# Altium PCB PCB1.PcbDoc
Units mil, origin at the board's own origin, x right, y up, seen from the top; angles counter-clockwise.
Board outline 1115 x 680 mil, 2 copper layers (Top Layer, Bottom Layer); 11 components, 15 nets, 59 pads, 13 vias.
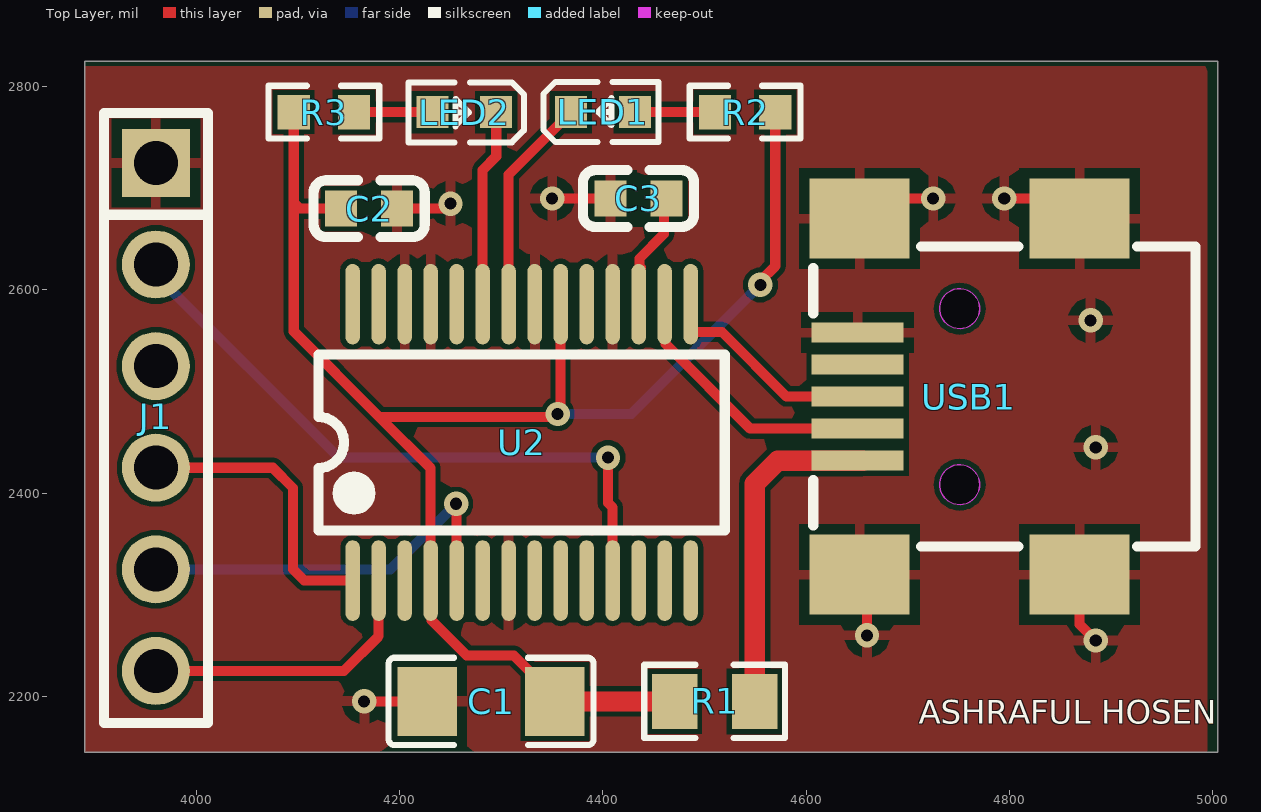
[diagram p0: Top Layer view]
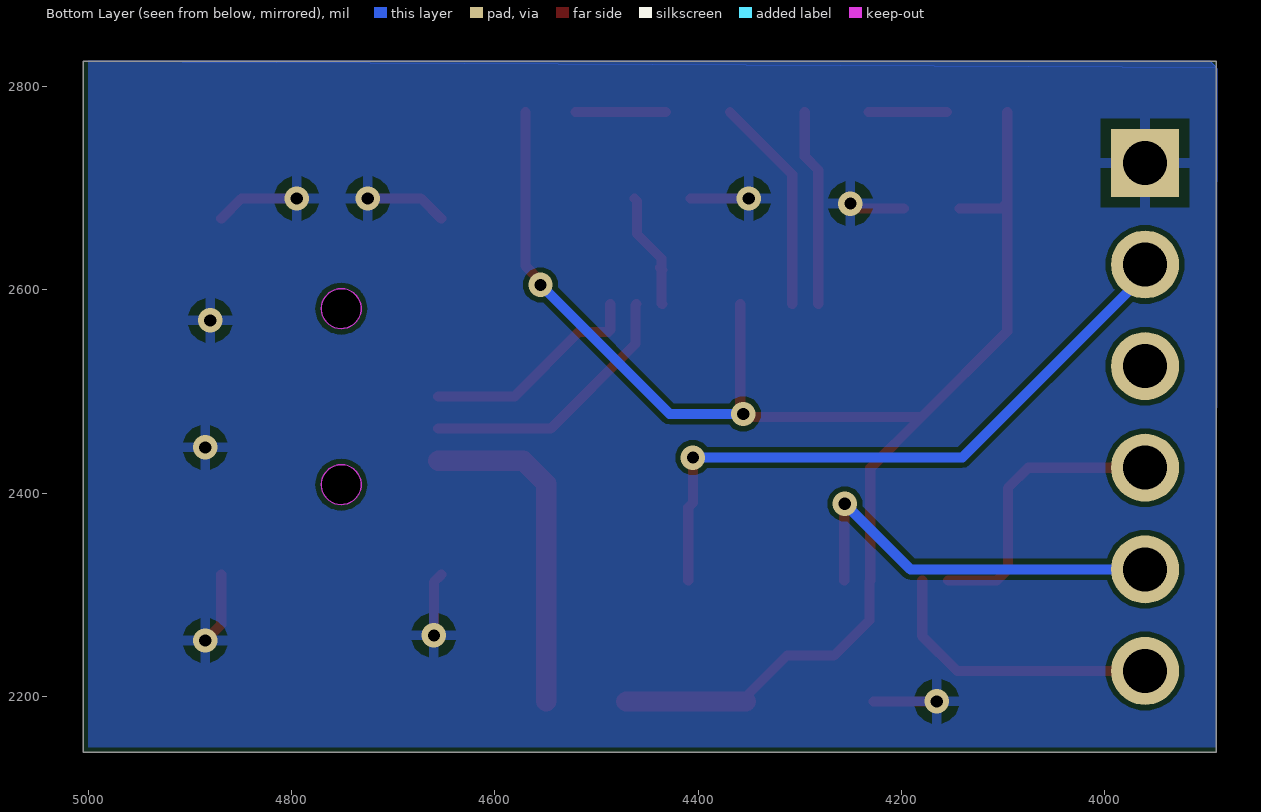
[diagram p1: Bottom Layer view, seen from below]

## Layer stack, top to bottom
Top Solder: solder mask 0.4, Solder Resist, Dk 3.5
Top Layer: signal copper 1.4
Dielectric 1: dielectric 12.6, FR-4, Dk 4.8
Bottom Layer: signal copper 1.4
Bottom Solder: solder mask 0.4, Solder Resist, Dk 3.5

## Board outline
3890,2145 5005,2145 5005,2825 3890,2825

## Design rules (kind name [scope] priority, off if disabled: settings)
Clearance [All] p1: gap=5 ignorepadtopadclearanceinfootprint=TRUE
PolygonConnect [All] p1: connectstyle=Relief reliefconductorwidth=10 reliefentries=4 polygonreliefangle="90 Angle" airgapwidth=10
RoutingVias [All] p1: holewidth=28 width=50 viastyle="Through Hole" minholewidth=28 minwidth=50 maxholewidth=28 maxwidth=50
SolderMaskExpansion [All] p1: expansion=4 istentingtop=FALSE
SupplyNets "Schematic Supply Nets_3" [InNet('+5V')] p1: voltage=0.000
SupplyNets "Schematic Supply Nets_2" [InNet('GND')] p2: voltage=0.000
SupplyNets "Schematic Supply Nets_1" [InNet('VCC')] p3: voltage=0.000
SupplyNets "Schematic Supply Nets" [InNet('+3V3')] p4: voltage=0.000
Width [All] p1: maxlimit=20 minlimit=10 preferedwidth=10
30 further rules are at their usual default settings.

## Components (designator, comment, footprint, x,y, rotation, side; value= is the part's Value field where it differs from the comment)
C1 "10uF" C1206 4290,2195 r0 top
C2 "0.1uF" C0603 4170,2680 r180 top value=100nF
C3 "0.1uF" C0603 4435,2690 r0 top value=100nF
J1 "HB-PH3-25416PB2GOP" HDR-TH_6P-P2.54-V-M 3960,2475 r270 top
LED1 "19-217/R6C-AL1M2VY/3T" LED0603-RD 4400,2775 r0 top
LED2 "19-217/R6C-AL1M2VY/3T" LED0603-RD 4263.52,2774.99 r180 top
R1 "0Ω" R0805 4510,2195 r0 top
R2 "1kΩ" R0603 4540,2775 r0 top
R3 "1kΩ" R0603 4125.34,2775 r180 top
U2 "FT232RL-REEL" SSOP-28_L10.2-W5.3-P0.65-LS7.8-BL 4320,2450 r0 top
USB1 "KH-MINI-SMT-5P-Cu" MINI-USB-SMD_KH-MINI-SMT-5P-CU 4760,2495 r90 top

## Footprints (in the part's own frame and the unit in brackets; to place one, negate y for a bottom-side part, rotate by r counter-clockwise, add the part's x,y. Pads: shape width x height; smd on the part's side, far side on the other; paste and mask are expansions set on the pad)
C0603 [mm]
  rect 0.8x0.9 smd: 1(-0.7,0) 2(0.7,0)
  silkscreen extent -1.39,-0.71 1.39,0.71
C1206 [mm]
  rect 1.485x1.728 smd paste-100 mask+0.051: 1(-1.593,0) 2(1.593,0)
  silkscreen extent -2.56,-1.09 2.56,1.09
HDR-TH_6P-P2.54-V-M [mm]
  rect 1.7x1.7 hole 1.1: 1(-6.35,0)
  round 1.7 hole 1.1: 2(-3.81,0) 3(-1.27,0) 4(1.27,0) 5(3.81,0) 6(6.35,0)
  silkscreen extent -7.6,-1.3 7.65,1.3
LED0603-RD [mm]
  rect 0.8x0.8 smd: 1(-0.799,0) 2(0.799,0)
  silkscreen extent -1.49,-0.75 1.39,0.76
MINI-USB-SMD_KH-MINI-SMT-5P-CU [mm]
  rect 0.5x2.3 smd paste+0 mask+0.05: 1(-1.6,2.775) 2(-0.8,2.775) 3(0,2.775) 4(0.8,2.775) 5(1.6,2.775)
  rect 2x2.5 smd paste+0 mask+0.05: 6(-4.45,-2.775) 7(-4.45,2.725) 8(4.45,-2.775) 9(4.45,2.725)
  Keep-Out Layer board cut-out: -1.7,0.225 -1.749,0.008 -1.888,-0.166 -2.089,-0.263 -2.311,-0.263 -2.512,-0.166 -2.65,0.008 -2.7,0.225 -2.7,0.225 -2.65,0.442 -2.512,0.616 -2.311,0.712 -2.089,0.712 -1.888,0.616 -1.749,0.442 -1.7,0.225
  Keep-Out Layer board cut-out: 2.7,0.225 2.65,0.008 2.512,-0.166 2.311,-0.263 2.089,-0.263 1.888,-0.166 1.749,0.008 1.7,0.225 1.7,0.225 1.749,0.442 1.888,0.616 2.089,0.712 2.311,0.712 2.512,0.616 2.65,0.442 2.7,0.225
  Keep-Out Layer circle w0.025: c-2.2,0.225 r0.5
  Keep-Out Layer circle w0.025: c2.2,0.225 r0.5
  Keep-Out Layer region: -1.7,0.225 -1.749,0.008 -1.888,-0.166 -2.089,-0.263 -2.311,-0.263 -2.512,-0.166 -2.65,0.008 -2.7,0.225 -2.7,0.225 -2.65,0.442 -2.512,0.616 -2.311,0.712 -2.089,0.712 -1.888,0.616 -1.749,0.442 -1.7,0.225
  Keep-Out Layer region: 2.7,0.225 2.65,0.008 2.512,-0.166 2.311,-0.263 2.089,-0.263 1.888,-0.166 1.749,0.008 1.7,0.225 1.7,0.225 1.749,0.442 1.888,0.616 2.089,0.712 2.311,0.712 2.512,0.616 2.65,0.442 2.7,0.225
  silkscreen extent -3.75,-5.67 3.75,3.89
R0603 [mil]
  rect 31.75x34.02 smd paste-3937.01 mask+2: 1(-29.66,0) 2(29.66,0)
  silkscreen extent -55,-26 55,26
R0805 [mm]
  rect 1.133x1.377 smd paste-100 mask+0.051: 1(-1,0) 2(1,0)
  silkscreen extent -1.76,-0.92 1.76,0.92
SSOP-28_L10.2-W5.3-P0.65-LS7.8-BL [mil]
  oval 14.33x79.35 smd: 1(-166.34,-136.03) 2(-140.75,-136.03) 3(-115.16,-136.03) 4(-89.57,-136.03) 5(-63.98,-136.03) 6(-38.39,-136.03) 7(-12.79,-136.03) 8(12.8,-136.03) 9(38.39,-136.03) 10(63.98,-136.03) 11(89.57,-136.03) 12(115.16,-136.03) 13(140.75,-136.03) 14(166.34,-136.03) 15(166.34,136.03) 16(140.75,136.03) 17(115.16,136.03) 18(89.57,136.03) 19(63.98,136.03) 20(38.39,136.03) 21(12.8,136.03) 22(-12.79,136.03) 23(-38.39,136.03) 24(-63.98,136.03) 25(-89.57,136.03) 26(-115.16,136.03) 27(-140.75,136.03) 28(-166.34,136.03)
  silkscreen extent -200,-87 200,87, body extent -201,-153 201,156, height 84

## Part data
C1: library part CL31A106KBHNNNE, "50V 10uF X5R ±10% 1206 Multilayer Ceramic Capacitors MLCC - SMD/SMT ROHS", JLCPCB Part Class="Basic Part", LCSC Part Name="10uF ±10% 50V", Manufacturer=SAMSUNG(三星), Tolerance=±10%, Add into BOM=yes, Convert to PCB=yes, Datasheet=https://atta.szlcsc.com/upload/public/pdf/source/20160218/1457707763339.pdf, Device=CL31A106KBHNNNE, Manufacturer Part=CL31A106KBHNNNE, Supplier=LCSC, Supplier Footprint=1206, Supplier Part=C13585, Symbol=CL31A106KBHNNNE
C2 C3: library part CC0603KRX7R9BB104, "50V 100nF X7R ±10% 0603 Multilayer Ceramic Capacitors MLCC - SMD/SMT ROHS", JLCPCB Part Class="Basic Part", LCSC Part Name="100nF ±10% 50V", Manufacturer=YAGEO(国巨), Temperature Coefficient=X7R, Tolerance=±10%, Voltage Rating=50V, Add into BOM=yes, Convert to PCB=yes, Datasheet=https://atta.szlcsc.com/upload/public/pdf/source/20180910/C282072_33301C7F631E79921B82A8DAC6BCC5B3.pdf, Device=CC0603KRX7R9BB104, Manufacturer Part=CC0603KRX7R9BB104, Supplier=LCSC, Supplier Footprint=0603, Supplier Part=C14663, Symbol=CC0603KRX7R9BB104
J1: "Gold 250V 3A Through Hole Pin Header 2.54mm 6P 6mm -40℃~+105℃ 3mm 2.54mm Brass Black 1 1x6P 2.54mm Plugin,P=2.54mm Pin Headers ROHS", Color=Black, Current Rating=3A, JLCPCB Part Class="Extended Part", LCSC Part Name="1x6P 间距:2.54mm 方针 直插", Manufacturer=HANBO(汉博), Operating Temperature=-40℃~+105℃, Voltage Rating (Max)=250V, Add into BOM=yes, Circluar Pins/Square Pins=Policy, Contact Material=Brass, Contact Plating=Gold, Convert to PCB=yes, Datasheet=https://atta.szlcsc.com/upload/public/pdf/source/20230803/F72D259687963761DF1B552F3BB84A31.pdf, Device=HB-PH3-25416PB2GOP, Insulation Height=2.54mm, Length of End Connection Pin=3mm, Length of Mating Pin=6mm, Manufacturer Part=HB-PH3-25416PB2GOP, Mounting Type=Straight, Number of Pins=6P, Number of Rows="Single Row", Pin Structure=1x6P, Pitch=2.54mm, Row Spacing=2.54mm, Supplier=LCSC, Supplier Footprint=插件,P=2.54mm, Supplier Part=C6332199, Symbol=HB-PH3-25416PB2GOP
LED1 LED2: "5mA Water Clear -40℃~+85℃ 617.5nm Red 120° 60mW 1.95V 0603 LED Indication - Discrete ROHS", Color Temperature=-, Emitted Color=Red, Forward Current=5mA, Forward Voltage (VF)=1.95V, JLCPCB Part Class="Extended Part", LCSC Part Name="红灯 停产 停产", Lens Color="Colorless Transparent Lens", Manufacturer=EVERLIGHT(亿光), Operating Temperature=-40℃~+85℃, Power Dissipation=60mW, Add into BOM=yes, Convert to PCB=yes, Datasheet=https://atta.szlcsc.com/upload/public/pdf/source/20160507/1462613613821.pdf, Device=19-217/R6C-AL1M2VY/3T, Diode Configuration=-, Dominant Wavelength=617.5nm, Manufacturer Part=19-217/R6C-AL1M2VY/3T, Mounting Sytle=-, Peak Wavelength=632nm, Supplier=LCSC, Supplier Footprint=0603, Supplier Part=C72044, Symbol=19-217/R6C-AL1M2VY/3T, Viewing Angle=120°
R1: library part "FRC0805P000 TS", "125mW Thick Film Resistor 150V ±5% 0Ω 0805 Chip Resistor - Surface Mount ROHS", JLCPCB Part Class="Extended Part", LCSC Part Name="0Ω ±5% 125mW 厚膜电阻", Manufacturer=FOJAN(富捷), Operating Temperature Range=-55℃~+155℃, Tolerance=±5%, Add into BOM=yes, Convert to PCB=yes, Datasheet=https://atta.szlcsc.com/upload/public/pdf/source/20211221/925EC7D7225764EE0046F22065062C87.pdf, Device="FRC0805P000 TS", Manufacturer Part="FRC0805P000 TS", Supplier=LCSC, Supplier Footprint=0805, Supplier Part=C2907288, Symbol="FRC0805P000 TS", Type="Thick Film Resistors"
R2 R3: library part RC0603FR-071KL, "100mW Thick Film Resistor 75V ±100ppm/℃ ±1% 1kΩ 0603 Chip Resistor - Surface Mount ROHS", JLCPCB Part Class="Extended Part", LCSC Part Name="厚膜电阻 1kΩ ±1% 100mW", Manufacturer=YAGEO(国巨), Operating Temperature=-55℃~+155℃, Power(Watts)=100mW, Temperature Coefficient=±100ppm/℃, Tolerance=±1%, Voltage-Supply(Max)=75V, Add into BOM=yes, Convert to PCB=yes, Datasheet=https://atta.szlcsc.com/upload/public/pdf/source/20180316/70C0E2BDAE7FCC62C531A5A58D202EE1.pdf, Device=RC0603FR-071KL, Manufacturer Part=RC0603FR-071KL, Supplier=LCSC, Supplier Footprint=0603, Supplier Part=C22548, Symbol=RC0603FR-071KL, Type="Thick Film Resistors"
U2: "USB to UART SSOP-28-208mil USB Converters ROHS", JLCPCB Part Class="Extended Part", LCSC Part Name="FT232R USB UART 芯片 停产", Manufacturer=FTDI(飞特帝亚), Operating Temperature=-40℃~+85℃, Voltage - Supply=3.3V~5.25V, Add into BOM=yes, Applications Function="USB to UART", Convert to PCB=yes, Datasheet=https://atta.szlcsc.com/upload/public/pdf/source/20130221/1457706592200.pdf, Device=FT232RL-REEL, Manufacturer Part=FT232RL-REEL, Protocol=-, Supplier=LCSC, Supplier Footprint=SSOP-28-208mil, Supplier Part=C8690, Symbol=FT232RL-REEL
USB1: "1A USB 2.0 1 Surface Mount, Right Angle 5P Female Mini-B SMD USB Connectors ROHS", Current Rating - Power (Max)=1A, JLCPCB Part Class="Extended Part", LCSC Part Name="Mini-B 母 卧贴", Manufacturer=kinghelm(金航标), Operating Temperature Range=-, Add into BOM=yes, Connector Type=Mini-B, Contact Material=-, Contact Plating=-, Convert to PCB=yes, Datasheet=https://atta.szlcsc.com/upload/public/pdf/source/20210202/C2688795_BF0BB16DAD2ABFC9845DEEA6AC1A1F9C.pdf, Device=KH-MINI-SMT-5P-Cu, Gender=Female, Manufacturer Part=KH-MINI-SMT-5P-Cu, Mounting Style=卧贴, Number of Contacts=5P, Number of Ports=1, Soldering Temperature(Max)=-, Standard="USB 2.0", Supplier=LCSC, Supplier Footprint=SMD, Supplier Part=C2688795, Symbol=KH-MINI-SMT-5P-CU

## Via types
v1: diameter 24, hole 12, Top Layer to Bottom Layer, tented both sides, 13 vias

## Nets (pads, with @x,y where several pads share a name; then routed paths per layer and width w, separated by ;. In a path a pad name is that pad's centre, name@x,y a point inside that pad or via, vN(x,y) a via of type N, cw(c..) or ccw(c..) an arc to the next point about the centre after c; other vN are vias at no path point)
+3V3: C3.2 U2.17 | length 118.7
  Top Layer w10: U2.17 4435.99,2586.86 4435.99,2630.99 4460,2655 4460,2687.44 C3.2 ; U2.17@4435.16,2619.71 U2.17@4437.56,2622.11
+5V: C1.2 C2.2 R1.1 R2.2 R3.2 U2.4 U2.20 | length 1595
  Top Layer w10: R3.2 4095.68,2685.86 ; C2.2 4101.54,2680 4095.68,2685.86 ; C1.2 4352.7,2199.78 4312.36,2240.12 4266.01,2240.12 4231.26,2274.88 4231.26,2313.14 U2.4 4230.43,2424.57 4180,2475 ; U2.20 4358.39,2480.86 4352.53,2475 4180,2475 ; v1(4555,2605) 4555,2608.79 4569.66,2623.45 R2.2 ; 4095.68,2685.86 4095.68,2559.32 4180,2475
  Top Layer w20: C1.2 R1.1
  Bottom Layer w10: v1(4355.46,2477.93) 4427.93,2477.93 v1(4555,2605)
CTS: J1.2 U2.11 | length 642.5
  Top Layer w10: v1(4405,2435) 4405,2390.38 4409.57,2385.81 U2.11
  Bottom Layer w10: J1.2@3960,2615 4140,2435 v1(4405,2435)
DTR: J1.6 U2.2 | length 288.2
  Top Layer w10: J1.6 4145,2225 4179.25,2259.25 U2.2
GND: C1.1 C2.1 C3.1 J1.1 U2.7 U2.18 U2.21 U2.25 U2.26 USB1.5 USB1.6 USB1.7 USB1.8 USB1.9 | length 471.3
  Top Layer w10: v1(4165,2195) C1.1 ; C2.1 4241.21,2680 4246.21,2685 v1(4250,2685) ; v1(4350,2690) C3.1 ; USB1.7 4660,2312.51 v1(4660,2260) ; USB1.9 4672.52,2690 v1(4725,2690) ; v1(4795,2690) 4849.45,2690 USB1.8 ; USB1.6 4869.26,2270.74 v1(4885,2255)
  other v1: 4885,2445 4880,2570
NetLED1_2: LED1.2 R2.1 | length 88.9
  Top Layer w10: LED1.2 R2.1@4520.34,2775.01
NetLED2_2: LED2.2 R3.1 | length 77.1
  Top Layer w10: R3.1 LED2.2
NetR1_2: R1.2 USB1.1 | length 330.1
  Top Layer w20: R1.2 4549.37,2409.37 4572.01,2432.01 USB1.1 USB1.1@4655.74,2432.01
RXD: J1.5 U2.5 | length 398.7
  Top Layer w10: v1@4255,2390 4256.02,2388.98 U2.5
  Bottom Layer w10: J1.5 4191.02,2325 v1(4255.51,2389.49)
RXLED: LED1.1 U2.22 | length 214.4
  Top Layer w10: U2.22 4307.21,2713.68 LED1.1
TXD: J1.4 U2.1 | length 286.5
  Top Layer w10: J1.4 4075,2425 4095,2405 4095,2325 4106.03,2313.97 U2.1
TXLED: LED2.1 U2.23 | length 194.5
  Top Layer w10: U2.23 4281.61,2718.07 4295,2731.46 LED2.1
USBDM: U2.16 USB1.2 | length 268.2
  Top Layer w10: U2.16 4461.58,2585.2 4461.58,2546.94 4545.01,2463.5 USB1.2@4655.74,2463.5
USBDP: U2.15 USB1.3 | length 222.1
  Top Layer w10: U2.15 4486.34,2560.52 4488.34,2558.52 4517.23,2558.52 4580.75,2495 USB1.3@4655.74,2495
VCC: J1.3
pads on no net: U2.3 U2.6 U2.8 U2.9 U2.10 U2.12 U2.13 U2.14 U2.19 U2.24 U2.27 U2.28 USB1.4

## Polygon pours and split planes (outlines as drawn)
GND on Bottom Layer "GND_L02_P004" (solid, pour order 4): 3888.62,2818.52 3895.1,2825 5000,2825 5000,2150 3890,2150
no net on Bottom Layer "NONET_L02_P002" (solid, pour order 2): 3890.01,2819.02 3895.99,2825 5000,2825
GND on Top Layer "GND_L01_P003" (solid, pour order 3): 3890,2820 5000,2820 4995,2815 4995,2145 3890,2145

## Silkscreen, mask and mechanical layers (free items; w line width, h text height)
Top Overlay:
  text "ASHRAFUL HOSEN" at 4710.85,2165.37 h40
Mechanical 1:
  lines w10: 3890,2145 3890,2825 5005,2825 5005,2655 5005,2315 5005,2145 3890,2145